# EAGLE board RPI 4B HAT board drawing (EAGLE 9.7.0)
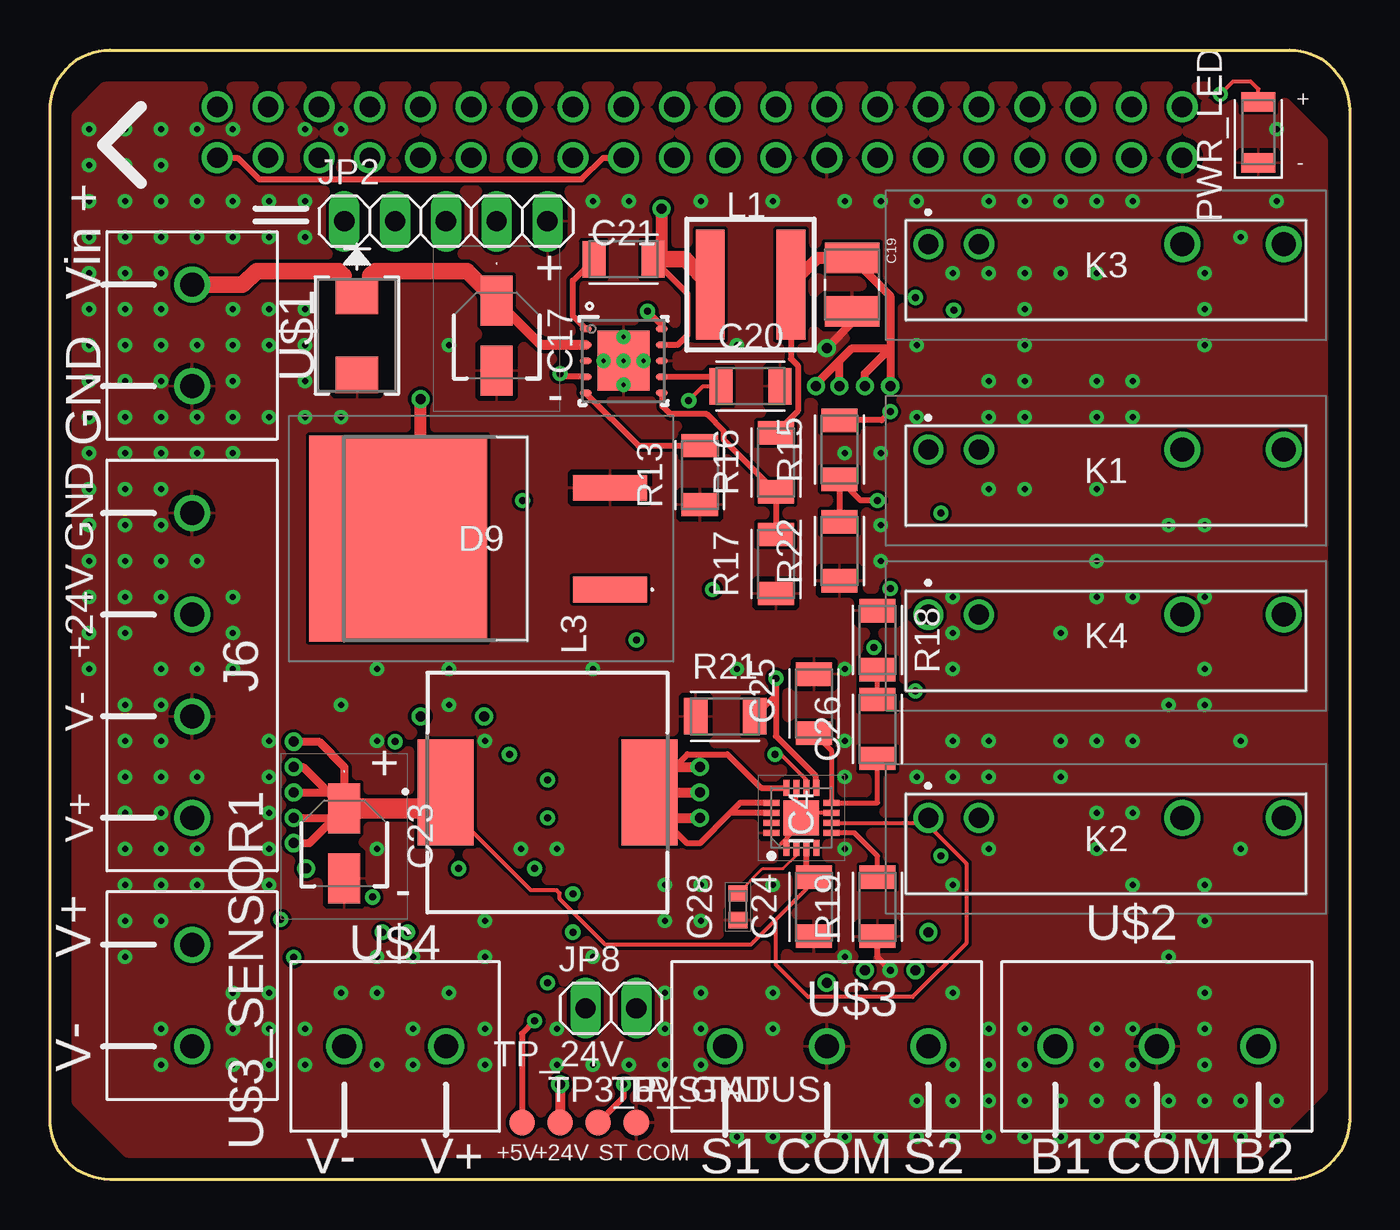
[diagram p0: board, top side]
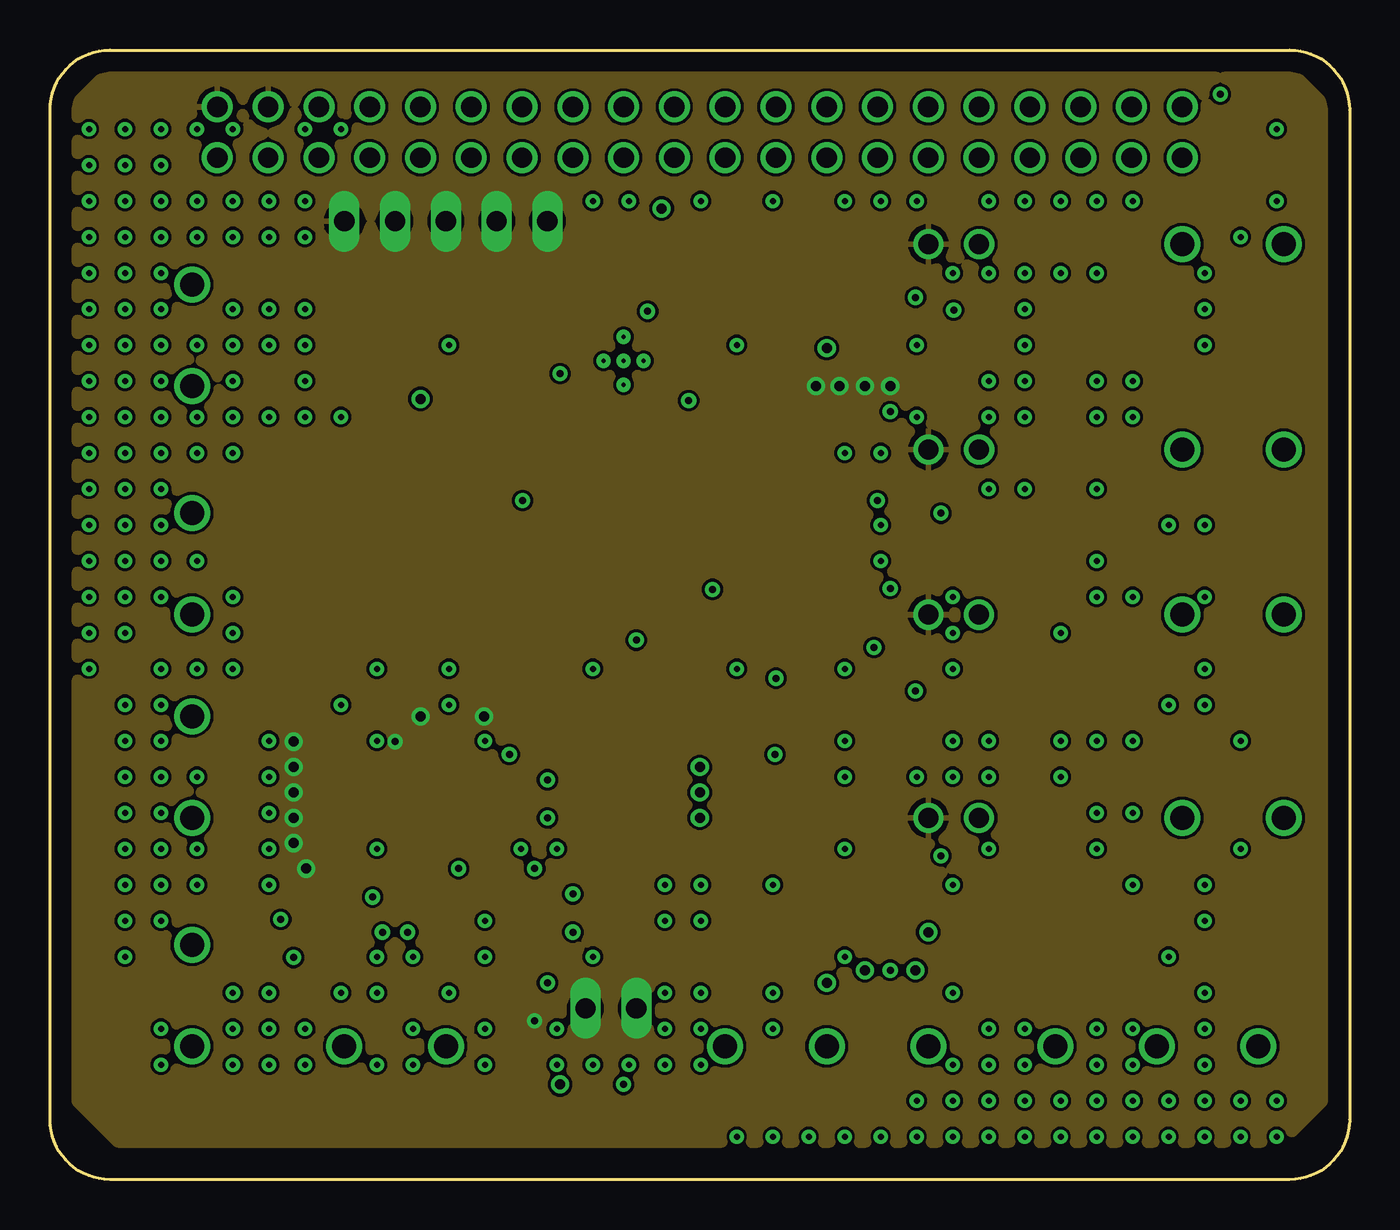
[diagram p1: board, inner layer Route2]
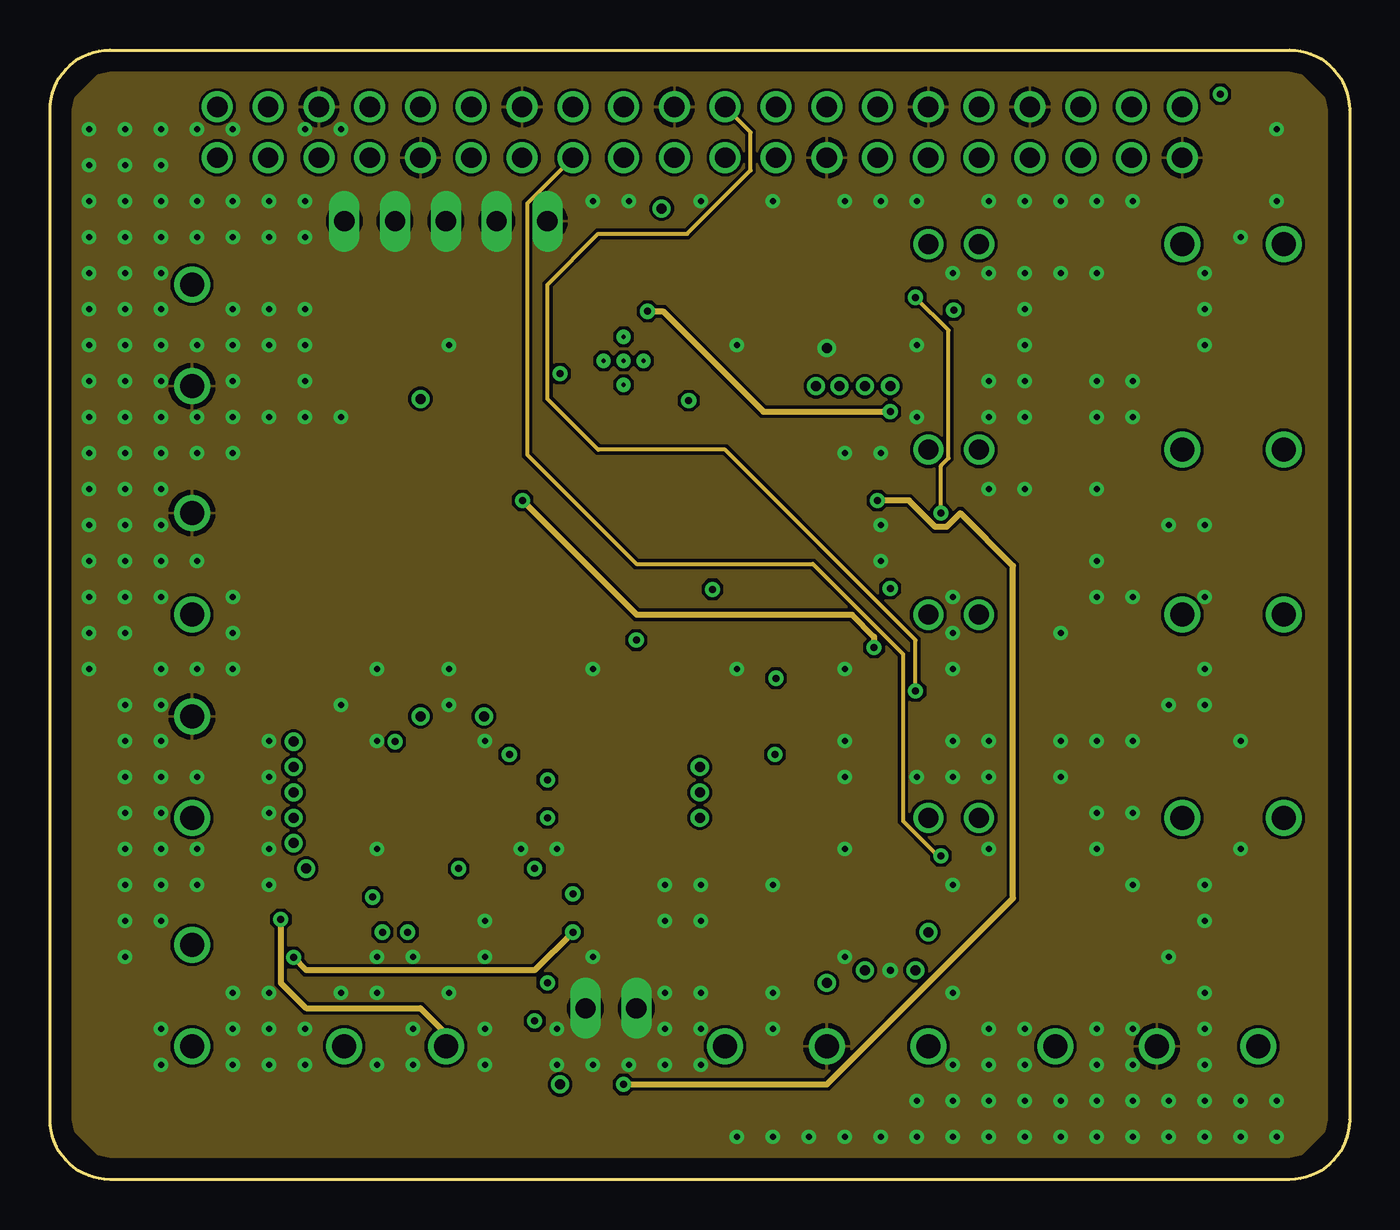
[diagram p2: board, inner layer Route3]
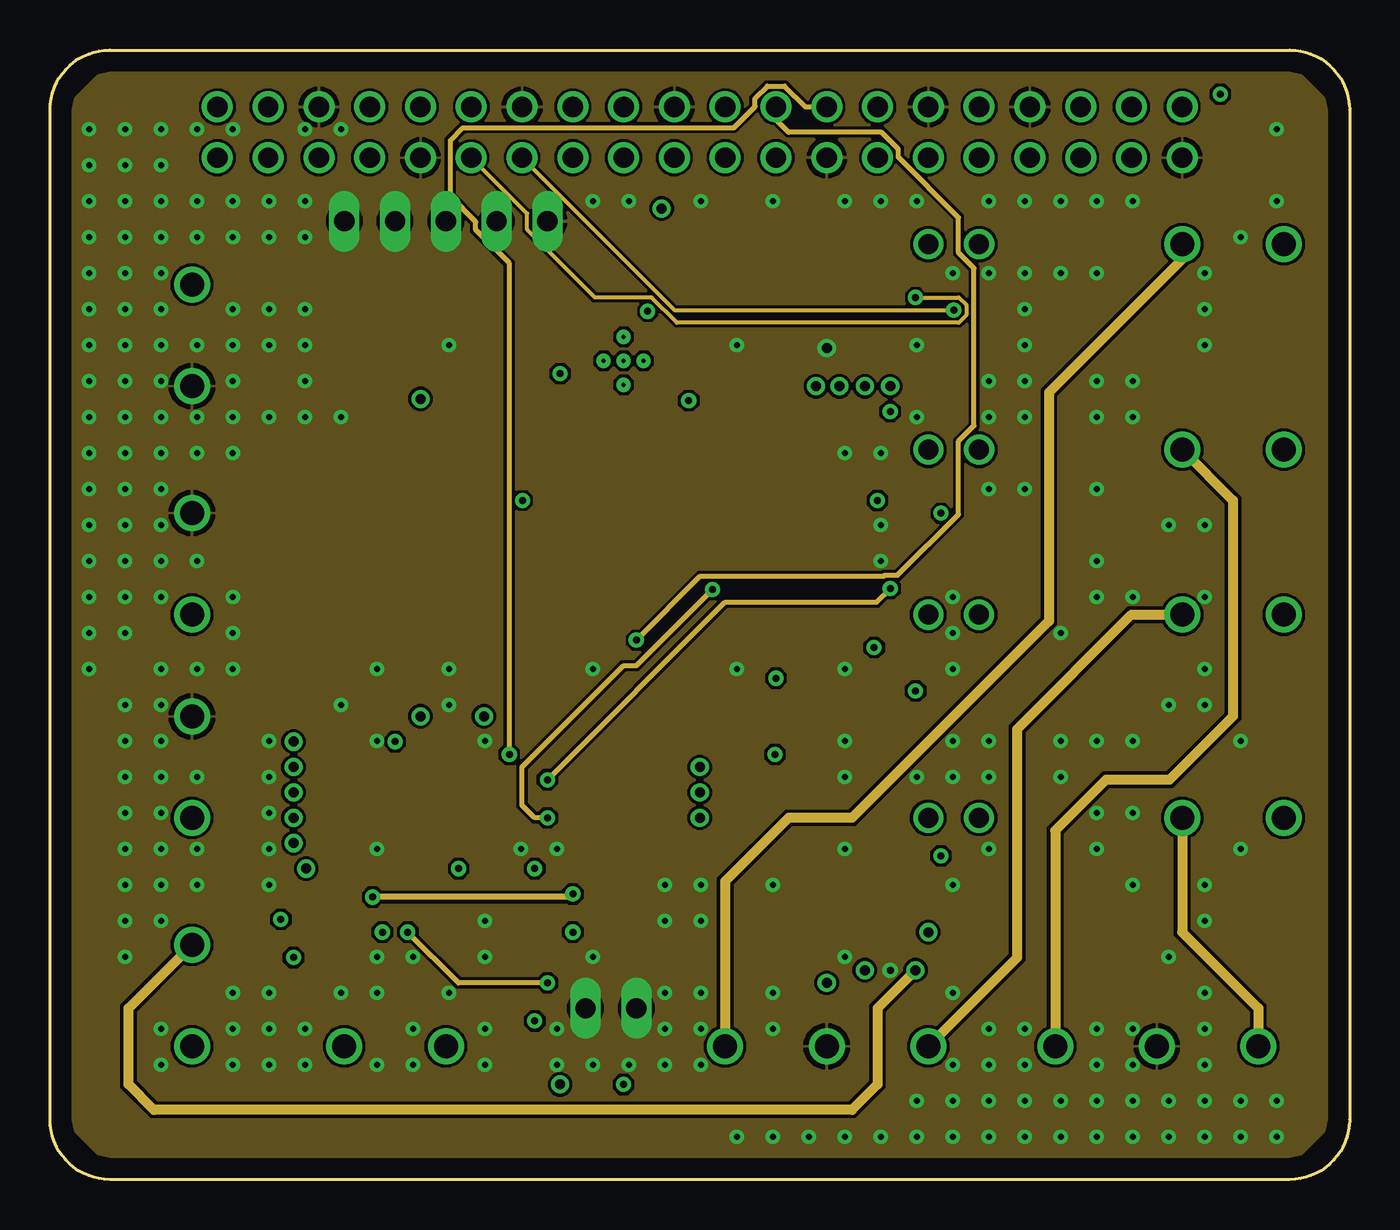
[diagram p3: board, inner layer Route14]
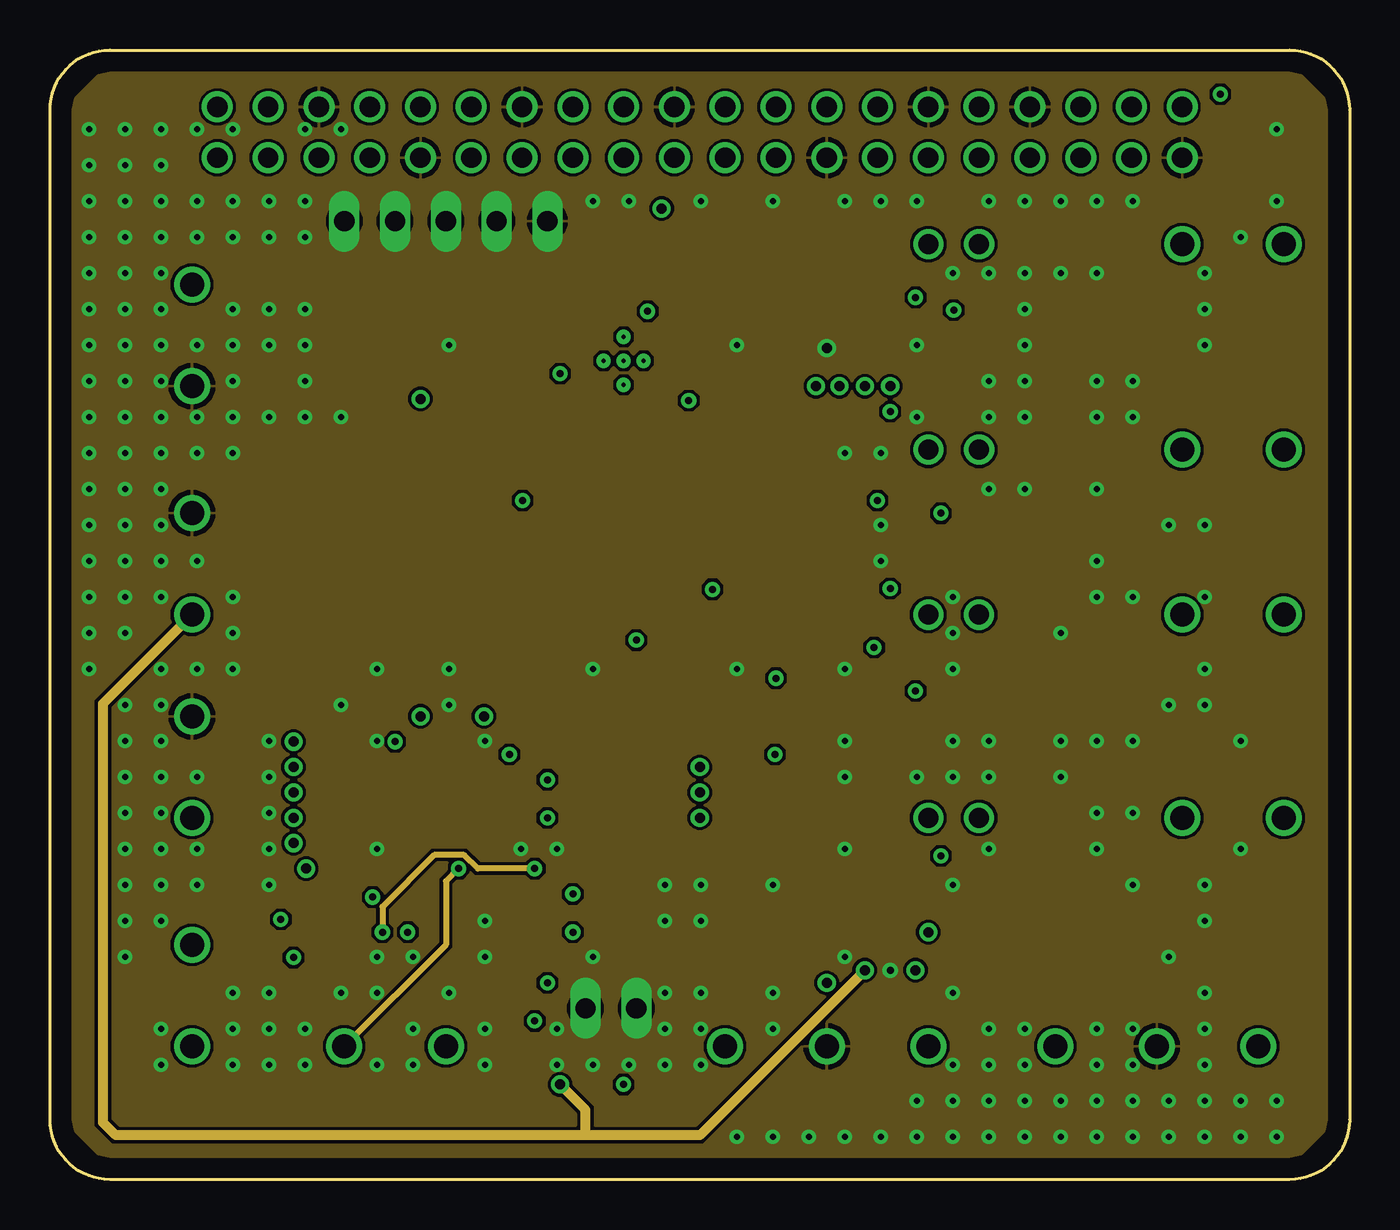
[diagram p4: board, inner layer Route15]
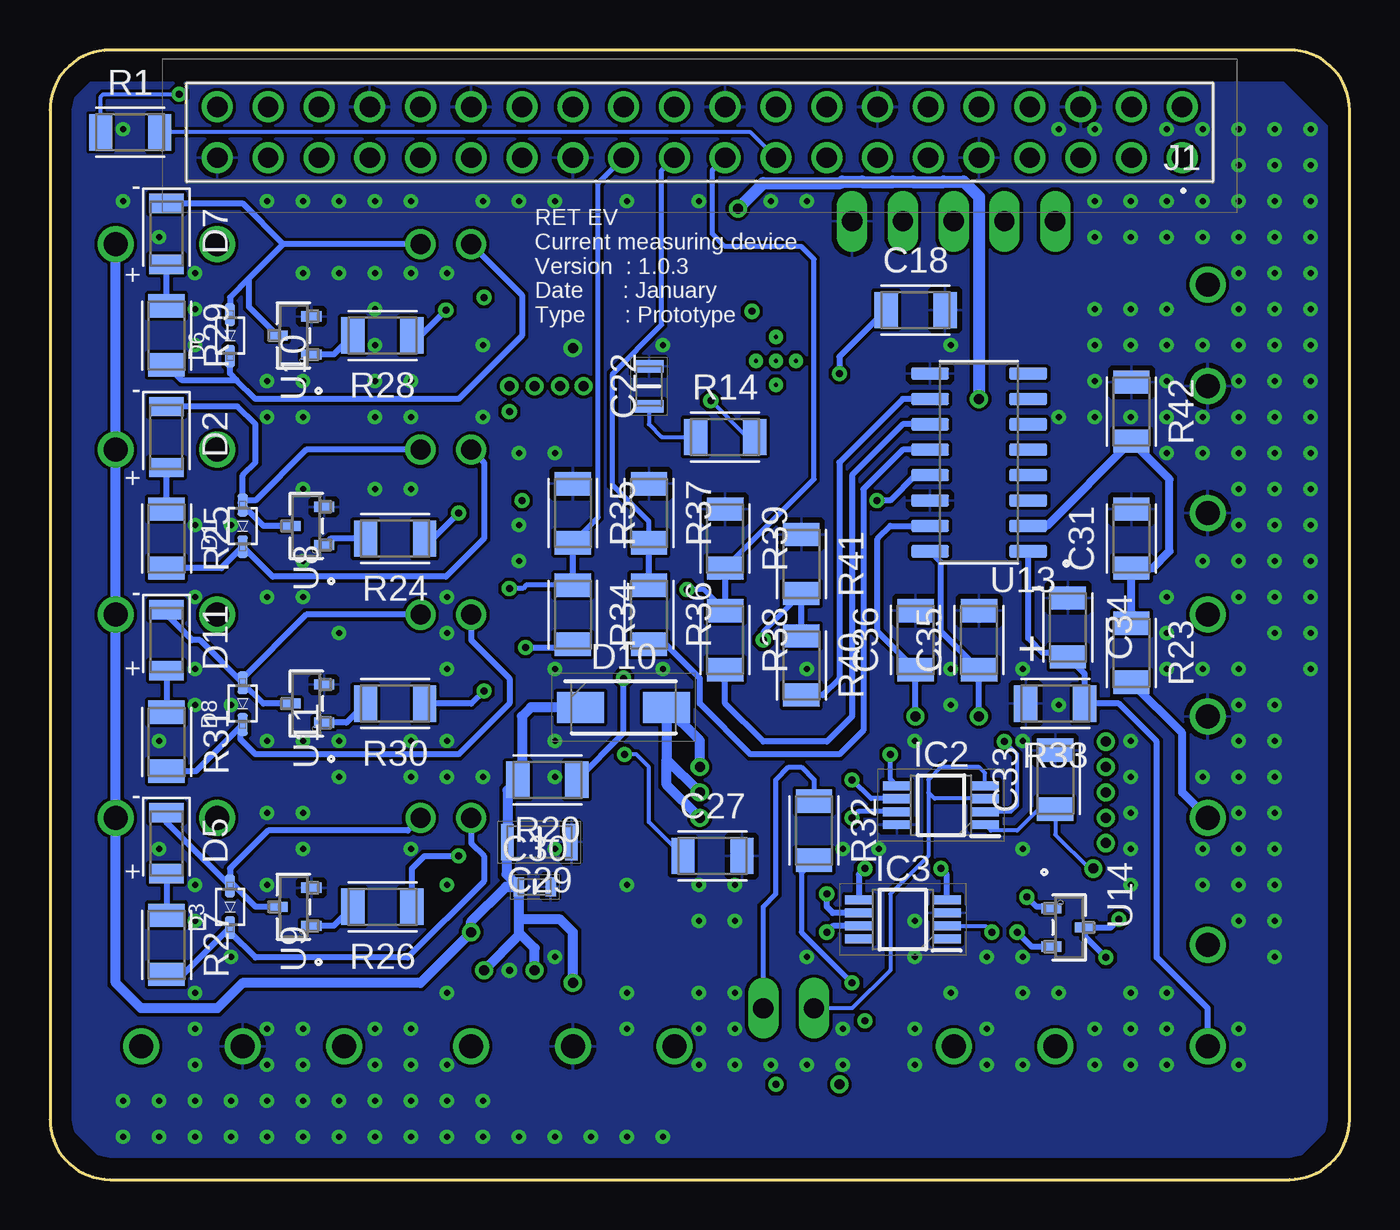
[diagram p5: board, bottom side, seen from below]

Size 65 x 56.5 mm. Coordinates in mm from the lower left corner, seen from the top.
Outline: 3,0 arc-90 0,3 0,53.5 arc-90 3,56.5 62,56.5 arc-90 65,53.5 65,3 arc-90 62,0 3,0
Copper layers (1+2*3+14*15+16): Top / Route2 / Route3 / Route14 / Route15 / Bottom
Stack-up 6 Layer Stack: Top SilkScreen Epoxy Ink / Top SolderMask SR:Green 0.0254mm Dk 4.3 / Top Surface Finish Lead-Free 0.02mm / Top CuFoil:007 0.035mm / Dielectric-1 Prepreg:001 0.064mm / Dielectric-2 Prepreg:001 0.064mm / Route2 CuFoil:007 0.035mm / Dielectric-3 Core:077 0.457mm / Route3 CuFoil:007 0.035mm / Dielectric-4 Prepreg:001 0.064mm / Dielectric-5 Prepreg:001 0.064mm / Route14 CuFoil:007 0.035mm / Dielectric-6 Core:077 0.457mm / Route15 CuFoil:007 0.035mm / Dielectric-7 Prepreg:001 0.064mm / Dielectric-8 Prepreg:001 0.064mm / Bottom CuFoil:007 0.035mm / Bottom Surface Finish Lead-Free 0.02mm / Bottom SolderMask SR:Green 0.0254mm Dk 4.3 / Bottom SilkScreen Epoxy Ink
Design rules: minimum copper width 6mil, minimum drill size 0.25mm, copper clearance wire_polygon to wire_polygon 6mil, copper clearance wire_polygon to pad_smd 6mil, copper clearance wire_polygon to via 6mil, copper clearance pad_smd to pad_smd 6mil, copper clearance pad_smd to via 6mil, copper clearance via to via 6mil, copper clearance smd to pad (same net) 6mil, copper clearance smd to via (same net) 6mil, copper clearance smd to smd (same net) 6mil, dimension clearance 40mil, via restrict clearance 0mil, restrict clearance 0mil, drill distance 6mil, keepout clearance 0mil

## Footprints (pad centres in the part's own frame; a part is rotated, then mirrored left to right if it is on the bottom)
EEE1AA220WR = smd 2.5 x 1.6: 1 -1.75,0; 2 1.75,0
CAPC3216X135 = smd 1.165 x 1.815: 1 -1.475,0; 2 1.475,0
CAPC3225X270N = smd 1.53 x 2.72: 1 -1.341,0; 2 1.341,0
CAPC2012X75N = smd 0.62 x 1.47: 1 -1,0; 2 1,0
CAPC1608X90N = smd 0.81 x 0.94: 1 -0.67,0; 2 0.67,0
CAPC3216X180N = smd 0.62 x 1.82: 1 -1.6,0; 2 1.6,0
CAPC1608X90N' = smd 0.54 x 0.94: 1 -0.8,0; 2 0.8,0
SMBJSERIES_LTF-L = smd 1.803 x 2.134: 1 -1.968,0; 2 1.968,0
SOD-323 = smd 1.14 x 0.52: A 1.04,0; C -1.04,0
LEDC3216X75N_FLAT-R = smd 0.962 x 1.712: A 1.525,0; C -1.525,0
T1210T8G = smd 3.7 x 1.3: 1 13.3,-2.54; 3 13.3,2.54 | smd 8.9 x 10.3: 2 2.7,0
DIOM5226X230N = smd 2.35 x 1.55: 1 -2.15,0; 2 2.15,0
SOP65P490X110-8N = smd 1.4 x 0.45: 1 -2.2,0.975; 2 -2.2,0.325; 3 -2.2,-0.325; 4 -2.2,-0.975; 5 2.2,-0.975; 6 2.2,-0.325; 7 2.2,0.325; 8 2.2,0.975
QFN50P300X300X80-17N = smd 0.8 x 0.3: 1 -1.5,0.75; 2 -1.5,0.25; 3 -1.5,-0.25; 4 -1.5,-0.75; 9 1.5,-0.75; 10 1.5,-0.25; 11 1.5,0.25; 12 1.5,0.75 | smd 0.3 x 0.8: 5 -0.75,-1.5; 6 -0.25,-1.5; 7 0.25,-1.5; 8 0.75,-1.5; 13 0.75,1.5; 14 0.25,1.5; 15 -0.25,1.5; 16 -0.75,1.5 | smd 1.76 x 1.76: 17 0,0
SSQ-120-XX-YYY = drill 1.02 pad 1.55: 1 0,0; 2 0,2.54; 3 -2.54,0; 4 -2.54,2.54; 5 -5.08,0; 6 -5.08,2.54; 7 -7.62,0; 8 -7.62,2.54; 9 -10.16,0; 10 -10.16,2.54; 11 -12.7,0; 12 -12.7,2.54; 13 -15.24,0; 14 -15.24,2.54; 15 -17.78,0; 16 -17.78,2.54; 17 -20.32,0; 18 -20.32,2.54; 19 -22.86,0; 20 -22.86,2.54; 21 -25.4,0; 22 -25.4,2.54; 23 -27.94,0; 24 -27.94,2.54; 25 -30.48,0; 26 -30.48,2.54; 27 -33.02,0; 28 -33.02,2.54; 29 -35.56,0; 30 -35.56,2.54; 31 -38.1,0; 32 -38.1,2.54; 33 -40.64,0; 34 -40.64,2.54; 35 -43.18,0; 36 -43.18,2.54; 37 -45.72,0; 38 -45.72,2.54; 39 -48.26,0; 40 -48.26,2.54
TERMBLK_508-4N = drill 1.2: 1 0,0; 2 5.08,0; 3 10.16,0; 4 15.24,0
1X05 = drill 1.016 long: 1 -5.08,0; 2 -2.54,0; 3 0,0; 4 2.54,0; 5 5.08,0
1X02 = drill 1.016 long: 1 -1.27,0; 2 1.27,0
APAN3105 = drill 1 pad 1.5: 1 0,0; 2 2.54,0 | drill 1.2 pad 1.8: 5 12.7,0; 6 17.78,0
XAL6060-103MEB = smd 1.43 x 5.5: 1 -2.02,0; 2 2.02,0
SRR1210 = smd 5.3 x 2.8: 1 0,-5.1; 2 0,5.1
RESC3216X70 = smd 1.165 x 1.815: 1 -1.475,0; 2 1.475,0
B1,27 = smd 1.27 x 1.27: TP 0,0
DPR0010A = smd 0.6 x 0.3: 1 -1.9,1.6; 2 -1.9,0.8; 3 -1.9,0; 4 -1.9,-0.8; 5 -1.9,-1.6; 6 1.9,-1.6; 7 1.9,-0.8; 8 1.9,0; 9 1.9,0.8; 10 1.9,1.6 | smd 2.6 x 3: 11 0,0 | drill 0.203 pad 0.5: V -1,0; V_1 0,-1.2; V_2 0,0; V_3 0,1.2; V_4 1,0
SOT23_NXP-L = smd 0.508 x 1.016: 1 -0.953,-0.894; 2 0.953,-0.894; 3 0,0.796
SOIC127P600X175-16N = smd 1.9 x 0.6: 1 -2.455,4.445; 2 -2.455,3.175; 3 -2.455,1.905; 4 -2.455,0.635; 5 -2.455,-0.635; 6 -2.455,-1.905; 7 -2.455,-3.175; 8 -2.455,-4.445; 9 2.455,-4.445; 10 2.455,-3.175; 11 2.455,-1.905; 12 2.455,-0.635; 13 2.455,0.635; 14 2.455,1.905; 15 2.455,3.175; 16 2.455,4.445
TERMBLK_508-2N = drill 1.2: 1 0,0; 2 5.08,0
TERMBLK_508-3N = drill 1.2: 1 0,0; 2 5.08,0; 3 10.16,0

## Placement (x,y rotation side)
C17  EEEFC1H2R2R  [EEE1AA220WR]  22.34,42.22 270 top
C18  2.7nF  [CAPC3216X135]  21.71,43.49 0 bottom
C19  GRM32EC81C476KE15L  [CAPC3225X270N]  40.12,44.76 270 top
C20  6.8pF  [CAPC3216X135]  35.04,39.68 0 top
C21  100nF  [CAPC3216X135]  28.69,46.03 180 top
C22  CGA4C2C0G1H472J060AA  [CAPC2012X75N]  35.04,39.68 90 bottom
C23  EEEFC1H2R2R  [EEE1AA220WR]  14.72,16.82 270 top
C24  100nF  [CAPC3216X135]  38.22,13.64 90 top
C25  22pF  [CAPC3216X135]  38.22,23.8 90 top
C26  12nF  [CAPC3216X135]  41.39,22.54 90 top
C27  10nF  [CAPC3216X135]  31.87,16.18 0 bottom
C28  EMK107B7105KA-T  [CAPC1608X90N]  34.41,13.64 270 top
C29  C3216X5R1H106K160AB  [CAPC3216X180N]  40.52,16.88 0 bottom
C30  CGA3E2X7R1H104K080AA  [CAPC1608X90N']  40.76,14.64 0 bottom
C31  0.1uF  [CAPC3216X135]  10.91,32.06 90 bottom
C33  0.1uF  [CAPC3216X135]  14.72,20 90 bottom
C34  15uF  [CAPC3216X135]  14.09,27.61 90 bottom
C35  0.1uF  [CAPC3216X135]  18.53,26.98 90 bottom
C36  0.1uF  [CAPC3216X135]  21.71,26.98 90 bottom
CR1  SMBJ54ASMBJSERIES_LTF-L  [SMBJSERIES_LTF-L]  15.36,42.22 270 top
D1  1N4148WS  [SOD-323]  55.36,32.7 90 bottom
D2  LED_RED  [LEDC3216X75N_FLAT-R]  59.18,37.14 270 bottom
D3  1N4148WS  [SOD-323]  55.99,13.64 90 bottom
D5  LED_RED  [LEDC3216X75N_FLAT-R]  59.17,16.82 270 bottom
D6  1N4148WS  [SOD-323]  55.99,42.22 90 bottom
D7  LED_RED  [LEDC3216X75N_FLAT-R]  59.17,47.3 270 bottom
D8  1N4148WS  [SOD-323]  55.36,23.8 90 bottom
D9  STPS30M60SG-TR  [T1210T8G]  14.72,32.06 0 top
D10  B240A-13-F  [DIOM5226X230N]  36.31,23.62 0 bottom
D11  LED_RED  [LEDC3216X75N_FLAT-R]  59.17,26.98 270 bottom
IC2  DAC8551IDGKR  [SOP65P490X110-8N]  20.44,18.72 180 bottom
IC3  XTR117AIDGKR  [SOP65P490X110-8N]  22.34,13.01 180 bottom
IC4  LM5157QRTERQ1  [QFN50P300X300X80-17N]  37.58,18.09 90 top
J1  SSQ-120-03-G-D  [SSQ-120-XX-YYY]  8.37,51.11 0 bottom
J6  2828XX-4282837-4  [TERMBLK_508-4N]  7.1,33.33 270 top
JP2  PINHD-1X5  [1X05]  19.8,47.94 0 top
JP8  [1X02]  28.05,8.56 0 top
K1  APAN3105  [APAN3105]  43.93,36.51 0 top
K2  APAN3105  [APAN3105]  43.93,18.09 0 top
K3  APAN3105  [APAN3105]  43.93,46.79 0 top
K4  APAN3105  [APAN3105]  43.93,28.25 0 top
L1  XAL6060-103MEB  [XAL6060-103MEB]  35.04,44.76 0 top
L3  SRR1210-270M  [SRR1210]  24.88,19.36 270 top
PWR_LED  LED_RED  [LEDC3216X75N_FLAT-R]  60.44,52.38 90 top
R1  1k  [RESC3216X70]  60.99,52.38 0 bottom
R13  221kΩ  [RESC3216X70]  32.5,35.24 90 top
R14  28.7kΩ  [RESC3216X70]  31.23,37.14 0 bottom
R15  1kΩ  [RESC3216X70]  39.48,36.51 90 top
R16  60.4kΩ  [RESC3216X70]  36.31,35.87 90 top
R17  11.5kΩ  [RESC3216X70]  36.31,30.79 90 top
R18  845Ω  [RESC3216X70]  41.39,26.98 270 top
R19  9.76kΩ  [RESC3216X70]  41.39,13.64 90 top
R20  57.6kΩ  [RESC3216X70]  40.12,20 180 bottom
R21  2.49kΩ  [RESC3216X70]  33.77,23.17 0 top
R22  499  [RESC3216X70]  39.48,31.43 90 top
R23  25k  [RESC3216X70]  10.91,26.34 270 bottom
R24  1k  [RESC3216X70]  47.74,32.06 180 bottom
R25  1k  [RESC3216X70]  59.17,32.06 270 bottom
R26  1k  [RESC3216X70]  48.38,13.64 180 bottom
R27  1k  [RESC3216X70]  59.17,11.74 270 bottom
R28  1k  [RESC3216X70]  48.38,42.22 180 bottom
R29  1k  [RESC3216X70]  59.17,42.22 270 bottom
R30  1k  [RESC3216X70]  47.74,23.8 180 bottom
R31  1k  [RESC3216X70]  59.17,21.9 270 bottom
R32  25k  [RESC3216X70]  26.79,17.45 270 bottom
R33  250  [RESC3216X70]  14.72,23.8 0 bottom
R34  1k  [RESC3216X70]  38.85,28.25 270 bottom
R35  2k  [RESC3216X70]  38.85,33.33 270 bottom
R36  1k  [RESC3216X70]  35.04,28.25 270 bottom
R37  2k  [RESC3216X70]  35.04,33.33 270 bottom
R38  1k  [RESC3216X70]  31.23,26.98 270 bottom
R39  2k  [RESC3216X70]  31.23,32.06 270 bottom
R40  1k  [RESC3216X70]  27.42,25.71 270 bottom
R41  2k  [RESC3216X70]  27.42,30.79 270 bottom
R42  25k  [RESC3216X70]  10.91,38.41 270 bottom
TP3_5V  TPB1,27  [B1,27]  25.52,2.85 0 top
TP_24V  TPB1,27  [B1,27]  23.61,2.85 180 top
TP_GND  TPB1,27  [B1,27]  29.32,2.85 0 top
TP_STATUS  TPB1,27  [B1,27]  27.42,2.85 0 top
U7  TPS54561QDPRRQ1DPR0010A  [DPR0010A]  28.69,40.95 0 top
U8  BC847SOT23_NXP-L  [SOT23_NXP-L]  52.19,32.7 90 bottom
U9  BC847SOT23_NXP-L  [SOT23_NXP-L]  52.82,13.64 90 bottom
U10  BC847SOT23_NXP-L  [SOT23_NXP-L]  52.82,42.22 90 bottom
U11  BC847SOT23_NXP-L  [SOT23_NXP-L]  52.19,23.8 90 bottom
U13  MCP3008-I/SL  [SOIC127P600X175-16N]  18.53,35.87 180 bottom
U14  BC847SOT23_NXP-L  [SOT23_NXP-L]  14.02,12.61 270 bottom
U$1  2828XX-2282837-2  [TERMBLK_508-2N]  7.1,39.68 90 top
U$2  2828XX-3282837-3  [TERMBLK_508-3N]  50.28,6.66 0 top
U$3  2828XX-3282837-3  [TERMBLK_508-3N]  33.77,6.66 0 top
U$3_SENSOR1  2828XX-2282837-2  [TERMBLK_508-2N]  7.1,6.66 90 top
U$4  2828XX-2282837-2  [TERMBLK_508-2N]  19.8,6.66 180 top

## Library data of the parts
C17 C23 = EEEFC1H2R2R; DESCRIPTION: Panasonic 2.2uF 50V dc Aluminium Electrolytic Capacitor, Surface Mount 4 (Dia.) x 5.4mm +105C 4mm; HEIGHT: 5.5mm; MANUFACTURER_NAME: Panasonic; MANUFACTURER_PART_NUMBER: EEEFC1H2R2R
C18 C20 C21 C24-C27 = Tinkercad; CATEGORY: Capacitor
C19 = GRM32EC81C476KE15L; AVAILABILITY: In Stock; CHECK_PRICES: https://www.snapeda.com/parts/GRM32EC81C476KE15L/Murata/view-part/?ref=eda; DESCRIPTION: 47 µF ±10% 16V Ceramic Capacitor X6S 1210 (3225 Metric); MF: Murata Electronics; MP: GRM32EC81C476KE15L; PACKAGE: 3225 Murata; PRICE: None; SNAPEDA_LINK: https://www.snapeda.com/parts/GRM32EC81C476KE15L/Murata/view-part/?ref=snap
C22 = CGA4C2C0G1H472J060AA; DESCRIPTION: Multilayer Ceramic Chip Capacitors, Capacitance=4.7nF, LxWxT:2x1.25x0.6mm; HEIGHT: 0.75mm; MANUFACTURER_NAME: TDK; MANUFACTURER_PART_NUMBER: CGA4C2C0G1H472J060AA; MOUSER_PART_NUMBER: 810-CGA4C2C0G1H472J; MOUSER_PRICE-STOCK: https://www.mouser.co.uk/ProductDetail/TDK/CGA4C2C0G1H472J060AA?qs=FxQuwy19cyCgdYzJw5%252BHfA%3D%3D
C28 = EMK107B7105KA-T; DESCRIPTION: Ceramic Capacitor 0603 16V 1uF; HEIGHT: 0.9mm; MANUFACTURER_NAME: TAIYO YUDEN; MANUFACTURER_PART_NUMBER: EMK107B7105KA-T; MOUSER_PART_NUMBER: 963-EMK107B7105KA-T; MOUSER_PRICE-STOCK: https://www.mouser.co.uk/ProductDetail/TAIYO-YUDEN/EMK107B7105KA-T?qs=I6KAKw0tg2zS1zj87Lm%2FxQ%3D%3D
C29 = C3216X5R1H106K160AB; DESCRIPTION: 1206 X5R ceramic capacitor 10uF 50V TDK 1206 C 10F Ceramic Multilayer Capacitor, 50 V dc X5R Dielectric +/-10% SMD; HEIGHT: 1.8mm; MANUFACTURER_NAME: TDK; MANUFACTURER_PART_NUMBER: C3216X5R1H106K160AB; MOUSER_PART_NUMBER: 810-C3216X5R1H106K; MOUSER_PRICE-STOCK: https://www.mouser.co.uk/ProductDetail/TDK/C3216X5R1H106K160AB?qs=NRhsANhppD%252BLHMbxvQzsEQ%3D%3D
C30 = CGA3E2X7R1H104K080AA; DESCRIPTION: Multilayer Ceramic Chip Capacitors, Capacitance=0.1uF, LxWxT:1.6x0.8x0.8mm; HEIGHT: 0.9mm; MANUFACTURER_NAME: TDK; MANUFACTURER_PART_NUMBER: CGA3E2X7R1H104K080AA; MOUSER_PART_NUMBER: 810-CGA3E2X7R1H104K; MOUSER_PRICE-STOCK: https://www.mouser.co.uk/ProductDetail/TDK/CGA3E2X7R1H104K080AA?qs=NRhsANhppD%2Fge2a869G9Fg%3D%3D
C31 C33-C36 = Capacitor; CATEGORY: Capacitor
CR1 = 2024-04-09_15-45-34_Library; COPYRIGHT: Copyright (C) 2024 Ultra Librarian. All rights reserved.; MANUFACTURER_PART_NUMBER: SMBJ54A; MFR_NAME: Littelfuse Inc
D1 D3 D6 D8 = Diodes; CREATED_BY: PCBLayout.com; DIGIKEY_PART_NUMBER: 1N4148WSFSTR-ND; MANUFACTURER: Diodes Incorporated; MPN: 1N4148WS; PACKAGE: SOD-323
D2 D5 D7 D11 PWR_LED = LED; CATEGORY: LED; COLOR: RED; DESCRIPTION: CHIP LED FLAT; SUB-CATEGORY: CHIP; TYPE: FLAT_TOP
D9 = STPS30M60SG-TR; DESCRIPTION: STMicroelectronics STPS30M60SG-TR, SMT Schottky Diode, 60V 30A, 3-Pin D2PAK; HEIGHT: 4mm; MANUFACTURER_NAME: STMicroelectronics; MANUFACTURER_PART_NUMBER: STPS30M60SG-TR; MOUSER_PART_NUMBER: 511-STPS30M60SG-TR; MOUSER_PRICE-STOCK: https://www.mouser.co.uk/ProductDetail/STMicroelectronics/STPS30M60SG-TR?qs=G49gCGQm93g67AcseEWC2A%3D%3D
D10 = B240A-13-F; DESCRIPTION: Schottky Diode 2A 40V 0.5Vf SMA Diodes Inc B240A-13-F, SMT Schottky Diode, 40V 2A, 2-Pin DO-214AC; HEIGHT: 2.3mm; MANUFACTURER_NAME: Diodes Incorporated; MANUFACTURER_PART_NUMBER: B240A-13-F; MOUSER_PART_NUMBER: 621-B240A-F; MOUSER_PRICE-STOCK: https://www.mouser.co.uk/ProductDetail/Diodes-Incorporated/B240A-13-F?qs=idJYQZufS6jleWUCPMvVdQ%3D%3D
IC2 = DAC8551IDGKR; DESCRIPTION: 16-Bit, Ultralow Glitch, Voltage Output, Digital to Analog Converter; HEIGHT: 1.1mm; MANUFACTURER_NAME: Texas Instruments; MANUFACTURER_PART_NUMBER: DAC8551IDGKR; MOUSER_PART_NUMBER: 595-DAC8551IDGKR; MOUSER_PRICE-STOCK: https://www.mouser.co.uk/ProductDetail/Texas-Instruments/DAC8551IDGKR?qs=vul0MlC%2Fa1dStr8sTUNGkA%3D%3D
IC3 = XTR117AIDGKR; DESCRIPTION: Sensor Interface XTR117 4-20mA Crnt Loop Transmitter; HEIGHT: 1.1mm; MANUFACTURER_NAME: Texas Instruments; MANUFACTURER_PART_NUMBER: XTR117AIDGKR; MOUSER_PART_NUMBER: 595-XTR117AIDGKR; MOUSER_PRICE-STOCK: https://www.mouser.co.uk/ProductDetail/Texas-Instruments/XTR117AIDGKR?qs=zqbRmZ%252BfZD%252BYMdmF%252BmhQwg%3D%3D
IC4 = LM5157QRTERQ1; DESCRIPTION: Switching Voltage Regulators 6-A, 50-V, 2.2-MHz wide VIN boost, flyback, & SEPIC converter with dual random spread spectrum; HEIGHT: 0.8mm; MANUFACTURER_NAME: Texas Instruments; MANUFACTURER_PART_NUMBER: LM5157QRTERQ1; MOUSER_PART_NUMBER: 595-LM5157QRTERQ1; MOUSER_PRICE-STOCK: https://www.mouser.co.uk/ProductDetail/Texas-Instruments/LM5157QRTERQ1?qs=QNEnbhJQKvb8%252BoI1%252BJEaeg%3D%3D
J1 = SSQ-120-03-G-D; DESCRIPTION: 40 Position, .100&quot; Tiger Buy&trade; Socket Strip, Square Tail; HEIGHT: mm; MANUFACTURER_NAME: SAMTEC; MANUFACTURER_PART_NUMBER: SSQ-120-03-G-D; MOUSER_PART_NUMBER: 200-SSQ12003GD; MOUSER_PRICE-STOCK: https://www.mouser.co.uk/ProductDetail/Samtec/SSQ-120-03-G-D?qs=rU5fayqh%252BE0nmWFGK5lT6g%3D%3D
J6 = Connector; CATEGORY: Fixed Terminal Blocks; DATASHEET: https://www.te.com/usa-en/product-282837-4.datasheet.pdf; DESCRIPTION: 4 Position Wire to Board Terminal Block Horizontal with Board 0.200" (5.08mm) Through Hole; MANUFACTURER: TE Connectivity AMP Connectors; MPN: 282837-4; OPERATING_TEMPERATURE: -40°C ~ 105°C; PACKAGE_SIZE: NA; PACKAGE_TYPE: THT; PART_STATUS: ACTIVE; PITCH: 0.200" (5.08mm); ROHS: COMPLIANT; SERIES: Buchanan; SUBCATEGORY: Terminal Blocks; TYPE: Through Hole Screw - Rising Cage Clamp Side wire entry Horizontal with Board
JP2 = Connector; CATEGORY: Headers; DESCRIPTION: Header-Straight-5 Position; PACKAGE_TYPE: THT; PITCH: 0.100" (2.54mm); SUBCATEGORY: Headers-Male Pins; TYPE: Board to Board or Cable-Unshrouded-Through Hole-Straight
JP8 = pinhead
K1-K4 = APAN3105; DESCRIPTION: Panasonic SPNO PCB Mount Non-Latching Relay, 5V dc Coil 5 A Non-Latching Relay; HEIGHT: 12mm; MANUFACTURER_NAME: Panasonic; MANUFACTURER_PART_NUMBER: APAN3105; MOUSER_PART_NUMBER: 769-APAN3105; MOUSER_PRICE-STOCK: https://www.mouser.co.uk/ProductDetail/Panasonic-Industrial-Devices/APAN3105?qs=WfzemSix46txUgv3897GSA%3D%3D
L1 = XAL6060-103MEB; DESCRIPTION: Fixed Inductors XAL6060 High Current 10 uH 20% 7 A Compos; HEIGHT: mm; MANUFACTURER_NAME: COILCRAFT; MANUFACTURER_PART_NUMBER: XAL6060-103MEB; MOUSER_PART_NUMBER: 994-XAL6060-103MEB; MOUSER_PRICE-STOCK: https://www.mouser.co.uk/ProductDetail/Coilcraft/XAL6060-103MEB?qs=VJjuEbE9QBODk8cxO8T25A%3D%3D
L3 = SRR1210-270M; DESCRIPTION: Bourns SRR1210 Series Type 1210 Shielded Wire-wound SMD Inductor with a Ferrite Core, 27 uH +/-20% Wire-Wound 5A Idc; HEIGHT: mm; MANUFACTURER_NAME: Bourns; MANUFACTURER_PART_NUMBER: SRR1210-270M; MOUSER_PART_NUMBER: 652-SRR1210-270M; MOUSER_PRICE-STOCK: https://www.mouser.co.uk/ProductDetail/Bourns/SRR1210-270M?qs=4vvWAaIu%2Fq78Cj5nf%2FUfqQ%3D%3D
R1 R13-R42 = Tinkercad; CATEGORY: Resistor; SUB-CATEGORY: Fixed
TP3_5V TP_24V TP_GND TP_STATUS = testpad
U7 = 2024-10-11_09-28-41_Library; COPYRIGHT: Copyright (C) 2024 Ultra Librarian. All rights reserved.; MANUFACTURER_PART_NUMBER: TPS54561QDPRRQ1; MFR_NAME: Texas Instruments; REFDES: RefDes; TYPE: TYPE
U8-U11 U14 = 2024-10-31_10-28-23_Library; COPYRIGHT: Copyright (C) 2024 Ultra Librarian. All rights reserved.; MANUFACTURER_PART_NUMBER: BC847; MFR_NAME: NXP
U13 = SnapEDA Library
U$1 U$3_SENSOR1 U$4 = Connector; CATEGORY: Connector; DESCRIPTION: 2 Position Wire to Board Terminal Block Horizontal with Board 5.08 mm Through Hole; MANUFACTURER: TE Connectivity; MPN: 282837-2; OPERATING_TEMPERATURE: -40°C to +105°C; PART_STATUS: ACTIVE; ROHS_COMPLIANCE: RoHS Compliant; SERIES: 282837; SUBCATEGORY: Terminal Block; TYPE: Side Wire Entry
U$2 U$3 = Connector; CATEGORY: Connector; DESCRIPTION: TERM BLK 3P SIDE ENT 5.08mm PCB; MANUFACTURER: TE Connectivity; MPN: 282837-3; OPERATING_TEMPERATURE: -40°C to +105°C; PART_STATUS: Active; ROHS_COMPLIANCE: RoHS Compliant; SERIES: 282837; SUBCATEGORY: Terminal Block; TYPE: Side Wire Entry

## Nets
+3V3: J1.1 J1.17 R1.2
+5V: C19.1 C23.1 C24.2 C33.1 C35.1 C36.1 D1.C D3.C D6.C D8.C IC2.1 IC2.2 IC4.3 IC4.6 J1.2 J1.4 JP2.1 K1.1 K2.1 K3.1 K4.1 L1.2 L3.1 R16.2 R25.2 R27.2 R29.2 R31.2 TP_24V.TP U13.15 U13.16
+24V: C29.1 C30.1 D10.1 J6.2 K1.6 K2.6 K3.6 K4.6 R20.2 TP3_5V.TP U$3_SENSOR1.2
BMS_OUT1: K1.5 U$2.1
BMS_OUT2: K2.5 U$2.3
CLK_ADC: R34.2 U13.13
DAC_OUT: IC2.3 IC2.4 JP8.1
DIN_ADC: R38.2 U13.11
DOUT_ADC: R36.2 U13.12
GND: C17.2 C18.2 C19.2 C20.2 C22.2 C23.2 C24.1 C25.2 C27.2 C28.2 C29.2 C30.2 C31.2 C33.2 C34.2 C35.2 C36.2 CR1.2 D9.3 IC2.8 IC3.3 IC4.1 IC4.7 IC4.11 IC4.16 IC4.17 J1.6 J1.9 J1.14 J1.20 J1.25 J1.30 J1.34 J1.39 J6.1 J6.3 JP2.5 PWR_LED.C R13.1 R17.1 R18.1 R19.1 R21.1 R22.1 R33.1 R35.1 R37.1 R39.1 R41.1 R42.1 TP_GND.TP U7.8 U7.11 U8.2 U9.2 U10.2 U11.2 U13.9 U13.14 U$1.1 U$2.2 U$3.2
GPIO0: J1.27
GPIO1: J1.28
GPIO2: J1.3
GPIO3: J1.5
GPIO4: J1.7
GPIO5: J1.29
GPIO6: J1.31
GPIO7: IC2.5 J1.26
GPIO8: J1.24 R40.1 R41.2
GPIO9: J1.21 R36.1 R37.2
GPIO10: IC2.7 J1.19 R38.1 R39.2
GPIO11: IC2.6 J1.23 R34.1 R35.2
GPIO12: J1.32
GPIO13: J1.33
GPIO14: J1.8
GPIO15: J1.10
GPIO16: J1.36
GPIO17: J1.11 R24.1
GPIO18: J1.12
GPIO19: J1.35
GPIO20: J1.38
GPIO21: J1.40
GPIO22: J1.15 R26.1
GPIO23: J1.16
GPIO24: J1.18
GPIO25: J1.22 R30.1
GPIO26: J1.37
GPIO27: J1.13 R28.1
N$1: J6.4 R23.2
N$2: D2.A R25.1
N$3: IC3.4 U$4.2
N$4: IC3.7 U14.3 U$4.1
N$5: PWR_LED.A R1.1
N$19: D1.A D2.C K1.2 U8.3
N$20: C34.1 R33.2 U13.1 U$3_SENSOR1.1
N$22: C17.1 CR1.1 U7.2 U$1.2
N$23: R13.2 U7.5
N$24: C18.1 U7.4
N$25: C22.1 R14.1
N$26: C20.1 R14.2 U7.7
N$27: C21.2 U7.1
N$28: C21.1 D9.2 L1.1 U7.9
N$29: R15.2 U7.10
N$30: R16.1 R17.2 U7.6
N$31: C28.1 IC4.2
N$32: C25.1 C26.1 IC4.8
N$33: C26.2 R18.2
N$34: C27.1 IC4.10
N$35: IC4.5 R19.2
N$36: D10.2 IC4.12 IC4.13 IC4.14 L3.2
N$37: IC4.9 R20.1 R21.2
N$38: R15.1 R22.2 TP_STATUS.TP
N$39: R24.2 U8.1
N$40: D3.A D5.C K2.2 U9.3
N$41: D5.A R27.1
N$42: R26.2 U9.1
N$43: D6.A D7.C K3.2 U10.3
N$44: D7.A R29.1
N$45: R28.2 U10.1
N$46: D8.A D11.C K4.2 U11.3
N$47: D11.A R31.1
N$48: R30.2 U11.1
N$49: IC3.5 U14.2
N$50: IC3.6 U14.1
N$51: JP8.2 R32.1
N$52: IC3.2 R32.2
N$56: C31.1 R23.1 R42.2 U13.2
SCADA_OUT1: K3.5 U$3.1
SCADA_OUT2: K4.5 U$3.3
SHDN/!CS_ADC: R40.2 U13.10

## Tracks (layer width: path | path; a pad name or v marks a point on that pad's centre or on a via)
+3V3
  Top 0.305: J1.1 9.38,51.11 10.46,50.03 26.6,50.03 27.68,51.11 J1.17
  Bottom 0.2: J1.17 29.96,52.38 R1.2
+5V  (via drill 0.35, 0.5)
  Top 0.203: IC4.3 37.83,14.53 36.31,13.01 | 36.31,13.01 35.04,11.74 27.8,11.74 25.49,14.04 25.49,14.32 25.35,14.46 24.06,14.46 19.47,19.05 | 36.31,13.01 36.31,10.74 37.92,9.13 43.14,9.13 45.84,11.82 45.84,15.81 43.8,17.84 IC4.6
  Top 0.305: C24.2 37.83,15.5 IC4.3 | v24.25,7.93 23.61,7.29 TP_24V.TP | L1.2 37.06,41.06 37.4,40.71 37.4,38.44 R16.2
  Top 0.406: C19.1 42.02,44.2 42.02,41.59 | v12.18,20.63 12.66,20.63 C23.1 | v12.18,19.36 13.93,19.36 C23.1 | v12.18,18.09 14.24,18.09 C23.1 | v12.19,16.83 12.98,16.83 C23.1 | v12.18,21.9 13.45,21.9 14.72,20.63 C23.1 | 42.02,41.59 v42.02,39.68 | v40.76,39.68 40.76,40.32 42.02,41.59 | v39.48,39.68 39.48,40.95 | 39.48,40.95 40.12,41.59 42.02,41.59 | v38.31,39.68 38.31,39.78 39.48,40.95
  Top 0.61: L1.2 38.4,46.1 C19.1
  Top 1.016: L3.1 19.47,19.05 18.99,18.57 C23.1
  Bottom 0.203: v12.82,15.55 13.02,15.55 14.72,17.25 C33.1 15.56,18.52 16.62,17.45 17.94,17.45 IC2.1 | IC2.2 16.95,18.4 16.62,18.72 16.62,21.27 v17.26,21.9
  Bottom 0.305: D1.C 55.48,31.54 | 59.17,31.02 R25.2 56.43,30.58 D1.C | v21.71,23.17 C36.1 23.61,27.41 23.61,32.06 22.98,32.7 U13.15 | v18.53,23.17 C35.1 20.44,27.41 20.44,30.87 U13.16 | K3.1 41.39,44.24 41.39,42.22 44.56,39.05 54.73,39.05 55.68,40 | 55.68,40 55.99,40.32 D6.C | R29.2 58.42,40 55.68,40 | K1.1 43.3,35.87 43.3,32.06 45.2,30.15 53.86,30.15 D1.C | D8.C 55.48,22.65 | 55.48,22.65 57.7,20.43 R31.2 | K4.1 43.93,26.98 42.02,25.07 42.02,23.8 44.56,21.27 54.73,21.27 55.48,22.02 55.48,22.65 | K2.1 43.93,16.82 43.3,16.18 43.3,14.91 47.11,11.11 54.73,11.11 55.99,12.38 D3.C 58.34,10.26 R27.2
  pour Route2: 0.75,53.65 0.75,4.12 3.29,1.58 61.71,1.58 64.25,4.12 64.25,53.65 61.71,56.19 3.29,56.19
+24V  (via drill 0.5)
  Top 0.508: v25.52,4.76 TP3_5V.TP
  Route14 0.508: v43.3,10.47 41.39,8.56 41.39,4.76 40.12,3.48 5.2,3.48 3.92,4.76 3.92,8.56 U$3_SENSOR1.2
  Route15 0.508: v40.76,10.47 32.5,2.22 26.79,2.22 | 26.79,2.22 3.29,2.22 2.66,2.85 2.66,23.8 J6.2 | 26.79,2.22 26.79,3.48 v25.52,4.76
  Bottom 0.508: D10.1 40.95,23.61 41.39,23.17 41.39,20.2 R20.2 42.12,19.47 C29.1 42.18,16.88 42.18,15.26 C30.1 | C30.1 42.19,14.64 43.93,12.9 v43.93,12.38 46.47,9.83 55.36,9.83 56.63,8.56 60.44,8.56 61.71,9.83 K2.6 K4.6 K1.6 K3.6 | C30.1 41.55,13.01 | 41.55,13.01 41.55,12.38 | 41.55,12.38 41.55,12.21 v43.3,10.47 | v40.76,10.47 40.76,11.57 41.55,12.38 | v38.85,9.83 38.85,12.38 39.48,13.01 41.55,13.01
BMS_OUT1
  Route14 0.508: U$2.1 50.28,17.45 52.82,20 55.99,20 59.17,23.17 59.17,33.97 K1.5
BMS_OUT2
  Route14 0.508: K2.5 56.63,12.38 60.44,8.56 U$2.3
CLK_ADC  (via drill 0.35)
  Route3 0.305: v41.22,26.62 41.22,27.15 40.12,28.25 29.35,28.25 v23.63,33.97
  Bottom 0.305: v41.22,26.62 39.01,26.62 R34.2 | U13.13 21.71,35.24 22.98,33.97 v23.63,33.97
DAC_OUT
  Bottom 0.203: IC2.4 18.23,20.34 18.53,20.63 20.44,20.63 21.07,20 21.07,19.36 | 21.07,19.36 21.07,16.18 22.98,14.28 22.98,10.47 24.88,8.56 JP8.1 | IC2.3 20.76,19.05 21.07,19.36
DIN_ADC
  Bottom 0.305: U13.11 22.34,37.78 24.88,35.24 24.88,23.17 26.15,21.9 29.32,21.9 31.23,23.8 R38.2
DOUT_ADC
  Bottom 0.305: R36.2 34.2,26.77 32.5,25.07 32.5,23.8 29.96,21.27 25.52,21.27 24.32,22.46 24.32,34.53 22.34,36.51 U13.12
GND  (via drill 0.3, 0.35, 0.5)
  Top 0.2: IC4.1 36.83,17.34 IC4.17 | IC4.7 37.83,18.34 IC4.17 | IC4.17 37.58,17.8 36.59,16.8
  Top 0.203: IC4.11 37.33,18.34 IC4.17
  Top 0.305: v42.02,10.47 41.39,11.11 R19.1
  Top 0.406: C19.2 40.12,42.86 v38.85,41.59
  other vias: 12.75,52.55 9.15,52.55 5.55,52.55 1.95,52.55 5.55,50.75 1.95,50.75 52.35,48.95 48.75,48.95 41.55,48.95 27.15,48.95 12.75,48.95 9.15,48.95 5.55,48.95 1.95,48.95 59.55,47.15 12.75,47.15 9.15,47.15 5.55,47.15 1.95,47.15 52.35,45.35 48.75,45.35 45.15,45.35 5.55,45.35 1.95,45.35 48.75,43.55 12.75,43.55 9.15,43.55 5.55,43.55 1.95,43.55 48.75,41.75 34.35,41.75 19.95,41.75 12.75,41.75 9.15,41.75 5.55,41.75 1.95,41.75 52.35,39.95 48.75,39.95 12.75,39.95 9.15,39.95 5.55,39.95 1.95,39.95 52.35,38.15 48.75,38.15 12.75,38.15 9.15,38.15 5.55,38.15 1.95,38.15 41.55,36.35 9.15,36.35 5.55,36.35 1.95,36.35 52.35,34.55 48.75,34.55 5.55,34.55 1.95,34.55 55.95,32.75 41.55,32.75 5.55,32.75 1.95,32.75 52.35,30.94 41.55,30.94 5.55,30.94 1.95,30.94 52.35,29.14 45.15,29.14 9.15,29.14 55.95,3.94 52.35,3.94 48.75,3.94 45.15,3.94 59.55,2.15 55.95,2.15 52.35,2.15 48.75,2.15 45.15,2.15 41.55,2.15 37.95,2.15 34.35,2.15 59.55,3.94 5.55,5.74 9.15,5.74 12.75,5.74 16.35,5.74 27.15,5.74 30.75,5.74 45.15,5.74 48.75,5.74 52.35,5.74 5.55,7.54 9.15,7.54 12.75,7.54 30.75,7.54 48.75,7.54 52.35,7.54 9.15,9.34 16.35,9.34 19.95,9.34 30.75,9.34 45.15,9.34 16.35,11.14 27.15,11.14 55.95,11.14 5.55,12.95 30.75,12.95 5.55,14.75 30.75,14.75 45.15,14.75 5.55,16.54 16.35,16.54 23.55,16.54 52.35,16.54 59.55,16.54 5.55,18.34 52.35,18.34 5.55,20.14 45.15,20.14 5.55,21.95 16.35,21.95 45.15,21.95 52.35,21.95 59.55,21.95 5.55,23.75 19.95,23.75 55.95,23.75 1.95,25.54 5.55,25.54 9.15,25.54 16.35,25.54 19.95,25.54 27.15,25.54 34.35,25.54 45.15,25.54 1.95,27.34 9.15,27.34 45.15,27.34 1.95,29.14 5.55,29.14 61.35,52.55 14.55,52.55 7.35,52.55 3.75,52.55 3.75,50.75 61.35,48.95 54.15,48.95 50.55,48.95 46.95,48.95 43.35,48.95 39.75,48.95 36.15,48.95 32.55,48.95 28.95,48.95 10.95,48.95 7.35,48.95 3.75,48.95 10.95,47.15 7.35,47.15 3.75,47.15 57.75,45.35 50.55,45.35 46.95,45.35 3.75,45.35 57.75,43.55 10.95,43.55 3.75,43.55 57.75,41.75 43.35,41.75 10.95,41.75 7.35,41.75 3.75,41.75 54.15,39.95 46.95,39.95 3.75,39.95 54.15,38.15 46.95,38.15 43.35,38.15 14.55,38.15 10.95,38.15 7.35,38.15 3.75,38.15 39.75,36.35 7.35,36.35 3.75,36.35 46.95,34.55 3.75,34.55 57.75,32.75 3.75,32.75 7.35,30.94 3.75,30.94 57.75,29.14 54.15,29.14 54.15,3.94 50.55,3.94 46.95,3.94 43.35,3.94 61.35,2.15 57.75,2.15 54.15,2.15 50.55,2.15 46.95,2.15 43.35,2.15 39.75,2.15 36.15,2.15 57.75,3.94 61.35,3.94 10.95,5.74 18.15,5.74 21.75,5.74 25.35,5.74 28.95,5.74 32.55,5.74 46.95,5.74 54.15,5.74 57.75,5.74 10.95,7.54 18.15,7.54 21.75,7.54 25.35,7.54 32.55,7.54 36.15,7.54 46.95,7.54 54.15,7.54 57.75,7.54 10.95,9.34 14.55,9.34 32.55,9.34 36.15,9.34 57.75,9.34 3.75,11.14 18.15,11.14 21.75,11.14 39.75,11.14 3.75,12.95 21.75,12.95 32.55,12.95 57.75,12.95 3.75,14.75 7.35,14.75 10.95,14.75 32.55,14.75 36.15,14.75 54.15,14.75 57.75,14.75 3.75,16.54 7.35,16.54 10.95,16.54 25.35,16.54 39.75,16.54 46.95,16.54 3.75,18.34 10.95,18.34 54.15,18.34 3.75,20.14 7.35,20.14 10.95,20.14 39.75,20.14 43.35,20.14 46.95,20.14 50.55,20.14 3.75,21.95 10.95,21.95 21.75,21.95 39.75,21.95 46.95,21.95 50.55,21.95 54.15,21.95 3.75,23.75 14.55,23.75 57.75,23.75 7.35,25.54 39.75,25.54 57.75,25.54 3.75,27.34 50.55,27.34 3.75,29.14
  pour Bottom: 0.75,52.38 0.75,2.85 2.66,0.94 62.35,0.94 64.25,2.85 64.25,53.65 62.98,54.92 3.29,54.92
  pour Top: 0.75,53.02 2.66,54.92 61.08,54.92 64.25,51.75 64.25,4.76 60.44,0.94 3.92,0.94 0.75,4.12
  pour Route3: 3.29,56.19 0.75,53.65 0.75,2.85 2.66,0.94 62.35,0.94 64.25,2.85 64.25,53.65 61.71,56.19
  pour Route14: 3.29,56.19 0.75,53.65 0.75,2.85 2.66,0.94 62.35,0.94 64.25,2.85 64.25,53.65 61.71,56.19
  pour Route15: 3.29,56.19 0.75,53.65 0.75,2.85 2.66,0.94 62.35,0.94 64.25,2.85 64.25,53.65 61.71,56.19
GPIO7  (via drill 0.35)
  Route14 0.254: J1.26 37.79,53.65 36.74,54.69 35.88,54.69 35.27,54.08 35.27,53.67 34.2,52.61 20.66,52.61 20.03,51.97 20.03,49.18 21.3,47.91 21.3,47.5 22.98,45.83 v22.98,21.27
  Bottom 0.254: IC2.5 22.98,20.04 v22.98,21.27
GPIO8  (via drill 0.35)
  Route14 0.254: J1.24 36.31,53.02 36.95,52.38 41.6,52.38 42.43,51.54 42.43,51.13 45.44,48.12 45.44,46.36 46.21,45.59 46.21,37.71 45.44,36.93 45.44,33.28 42.39,30.23 41.75,30.23 41.7,30.18 32.52,30.18 v29.32,26.98
  Bottom 0.254: R41.2 29.32,27.41 v29.32,26.98
  Bottom 0.305: R40.1 R41.2
GPIO9
  Bottom 0.254: J1.21 34.41,50.48 34.41,42.76 36.86,40.3 36.86,34.74 35.04,32.92 R37.2
  Bottom 0.305: R36.1 R37.2
GPIO10  (via drill 0.35)
  Route14 0.254: v24.88,18.09 24.25,18.09 23.61,18.72 23.61,20.63 28.69,25.71 29.32,25.71 v33.13,29.52
  Bottom 0.254: R39.2 26.79,35.03 26.79,46.03 27.42,46.67 31.23,46.67 31.87,47.3 31.87,50.48 J1.19 | IC2.7 24.57,18.4 v24.88,18.09 | R38.1 32.3,29.52 v33.13,29.52
  Bottom 0.305: R39.2 R38.1
GPIO11  (via drill 0.35)
  Route14 0.254: v24.88,20 33.77,28.88 41.34,28.88 v42.02,29.57
  Bottom 0.254: R35.2 37.58,33.12 37.58,49.84 J1.23 | IC2.6 23.94,19.05 v24.88,20 | R34.1 41.19,29.72 41.34,29.57 v42.02,29.57
  Bottom 0.305: R34.1 R35.2
GPIO17  (via drill 0.35)
  Route3 0.203: v44.56,33.33 44.56,35.71 44.94,36.09 44.94,42.48 v43.3,44.12
  Route14 0.203: J1.11 23.86,48.32 23.86,47.51 27.25,44.12 30.09,44.12 31.36,42.86 45.46,42.86 45.83,43.23 45.83,43.75 45.46,44.12 v43.3,44.12
  Bottom 0.305: v44.56,33.33 45.84,32.06 R24.1
GPIO22  (via drill 0.35)
  Route3 0.203: J1.15 23.86,48.82 23.86,36.25 29.32,30.79 38.16,30.79 42.66,26.28 42.66,17.93 44.41,16.18 v44.56,16.18
  Bottom 0.305: R26.1 46.9,15.55 46.27,16.18 v44.56,16.18
GPIO25  (via drill 0.35)
  Route3 0.203: v43.3,24.44 43.3,26.98 33.77,36.51 27.42,36.51 24.88,39.05 24.88,44.76 27.42,47.3 31.87,47.3 35.04,50.48 35.04,52.38 J1.22
  Bottom 0.305: v43.3,24.44 43.93,23.8 R30.1
GPIO27  (via drill 0.35)
  Route14 0.203: v45.2,43.49 31.23,43.49 J1.13
  Bottom 0.203: 46.9,43.06 R28.1
  Bottom 0.305: v45.2,43.49 46.47,42.22 R28.1
N$1
  Bottom 0.305: 10.91,24.44 R23.2
  Bottom 0.406: J6.4 8.37,19.36 8.37,22.33 R23.2
N$2
  Bottom 0.305: D2.A R25.1
N$3  (via drill 0.35)
  Route15 0.305: v20.44,15.55 19.8,14.91 19.8,11.74 U$4.2
  Bottom 0.305: IC3.4 20.14,15.25 v20.44,15.55
N$4  (via drill 0.35)
  Route3 0.305: v26.15,12.38 24.25,10.47 12.82,10.47 v12.18,11.11 | v11.55,13.01 11.55,9.83 12.82,8.56 18.53,8.56 19.8,7.29 U$4.1
  Bottom 0.305: IC3.7 25.84,12.68 v26.15,12.38 | v12.18,11.11 13.22,12.14 U14.3 11.95,12.61 v11.55,13.01
N$5  (via drill 0.35)
  Top 0.2: PWR_LED.A 60.44,54.54 60.06,54.92 59.17,54.92 v58.54,54.29
  Bottom 0.2: R1.1 62.46,54.17 62.35,54.29 v58.54,54.29
N$19
  Bottom 0.305: D1.A 55.48,33.85 | U8.3 54.32,32.7 D1.A | D1.A 55.36,33.97 | 55.36,33.97 55.36,35.24 54.73,35.87 54.73,37.78 55.62,38.67 D2.C | K1.2 52.19,36.51 54.73,33.97 55.36,33.97
N$20
  Bottom 0.305: U$3_SENSOR1.1 7.1,8.56 9.64,11.11 9.64,21.9 11.55,23.8 R33.2 13.25,25.3 C34.1 14.29,26.34 15.36,26.34 16.07,27.07 U13.1
N$22
  Top 0.508: U7.2 24.56,41.75 C17.1
  Top 0.813: U$1.2 9.64,44.76 10.33,45.45 14.46,45.45 14.7,45.21 14.7,44.85 CR1.1 16.02,44.85 16.02,45.21 16.25,45.45 20.86,45.45 C17.1
N$23
  Top 0.305: U7.5 29.43,36.71 R13.2
N$24  (via drill 0.35)
  Top 0.305: U7.4 25.68,40.15 v25.52,40.32
  Bottom 0.305: C18.1 25.52,41.16 v25.52,40.32
N$25
  Bottom 0.203: R14.1 34.41,37.14 35.04,37.78 C22.1
N$26  (via drill 0.35)
  Top 0.203: v31.95,38.96 32.67,39.68 C20.1
  Top 0.305: U7.7 33.09,40.15 C20.1
  Bottom 0.203: v31.95,38.96 30.13,37.14 R14.2
N$27
  Top 0.305: U7.1 26.15,43.19 26.15,44.97 C21.2
N$28  (via drill 0.5)
  Top 0.305: C21.1 31.87,44.33 31.87,42.22 31.4,41.75 U7.9
  Top 0.61: D9.2 18.53,33.17 v18.53,39.05 | v30.59,48.57 30.59,46.46 C21.1
  Top 0.813: C21.1 31.75,46.03 L1.1
  Bottom 0.61: v30.59,48.57 29.32,49.84 25.46,49.84 25.39,49.92 24.38,49.92 24.34,49.88 22.88,49.88 22.85,49.92 21.84,49.92 21.8,49.88 20.34,49.88 20.3,49.92 19.3,49.92 18.53,49.15 v18.53,39.05
N$29  (via drill 0.35)
  Top 0.305: v42.02,38.41 41.59,37.98 R15.2 | v29.89,43.43 30.59,42.73 U7.10
  Route3 0.305: v42.02,38.41 35.68,38.41 30.66,43.43 v29.89,43.43
N$30
  Top 0.305: R17.2 R16.1 33.71,36.99 33.71,37.42 32.85,38.28 31.03,38.28 30.63,38.68 30.63,39.31 U7.6
N$31
  Top 0.152: C28.1 35.64,15.55 36.66,15.55 37.33,16.22 IC4.2
N$32
  Top 0.254: C26.1 41.39,18.84 IC4.8 39.08,21.46 C25.1
N$33
  Top 0.254: C26.2 R18.2
N$34  (via drill 0.35)
  Top 0.2: v36.26,21.27 36.56,21.27 37.83,20 IC4.10
  Bottom 0.2: C27.1 35.04,17.88 35.04,20.63 35.68,21.27 v36.26,21.27
N$35
  Top 0.254: IC4.5 40.23,17.34 41.39,16.18 R19.2
N$36  (via drill 0.5)
  Top 0.305: IC4.13 34.52,18.84 34.02,18.34 | 34.02,18.34 32.5,16.82 31.87,16.82 29.98,18.7 L3.2 31.88,21.27 33.88,21.27 35.56,19.59 IC4.12 | IC4.14 34.02,18.34
  Top 0.508: L3.2 31.25,20.63 v32.5,20.63 | L3.2 31.25,18.09 v32.5,18.09 | L3.2 v32.5,19.36
  Bottom 0.508: v32.5,20.63 32.5,21.95 D10.2 34.16,21.02 | v32.5,19.36 34.16,21.02 | v32.5,18.09 34.16,19.75 34.16,21.02
N$37  (via drill 0.35)
  Top 0.305: R21.2 36.31,24.23 v36.31,25.07 36.31,22.18 38.29,20.21 38.29,19.63 IC4.9
  Bottom 0.305: R20.1 36.31,22.33 v36.31,25.07
N$38  (via drill 0.35)
  Top 0.305: R22.2 R15.1 40.55,33.97 v41.39,33.97 | v28.69,4.76 28.69,4.12 TP_STATUS.TP
  Route3 0.305: v28.69,4.76 38.85,4.76 48.16,14.07 48.16,30.7 45.53,33.33 44.85,32.65 44.28,32.65 42.96,33.97 v41.39,33.97
N$39
  Bottom 0.305: R24.2 50.97,32.06 U8.1
N$40
  Bottom 0.305: 59.02,18.5 D5.C 59.17,17.86 D3.A 55.99,14.91 | K2.2 47.11,17.45 54.09,17.45 55.99,15.55 55.99,14.91 | U9.3 54.73,13.64 55.99,14.91
N$41
  Bottom 0.305: D5.A R27.1
N$42
  Bottom 0.305: R26.2 50.8,12.69 U9.1
N$43
  Bottom 0.305: K3.2 53.33,46.79 | 53.33,46.79 55.04,45.08 | 55.04,45.08 55.99,44.12 D6.A | U10.3 55.04,43.65 55.04,45.08 | D7.C 55.37,48.83 53.33,46.79
N$44
  Bottom 0.305: R29.1 D7.A
N$45
  Bottom 0.305: R28.2 50.8,41.27 U10.1
N$46
  Bottom 0.305: D8.A 55.48,24.96 52.19,28.25 K4.2 | U11.3 54.32,23.8 D8.A | D8.A 57.49,26.98 57.9,26.98 59.17,28.25 D11.C
N$47
  Bottom 0.305: D11.A R31.1
N$48
  Bottom 0.305: R30.2 50.17,22.85 U11.1
N$49  (via drill 0.35)
  Route15 0.305: v16.62,12.38 16.62,13.64 19.21,16.23 20.72,16.23 21.4,15.55 v24.25,15.55
  Bottom 0.305: v16.62,12.38 15.9,11.65 U14.2 | IC3.5 24.54,15.25 v24.25,15.55
N$50  (via drill 0.35)
  Route14 0.305: v26.15,14.28 26,14.13 v16.14,14.13
  Bottom 0.305: IC3.6 25.84,13.33 26.15,13.64 v26.15,14.28 | U14.1 15,13.64 15.66,13.64 v16.14,14.13
N$51
  Bottom 0.254: JP8.2 29.32,13.64 28.69,14.28 28.69,20 28.05,20.63 27.42,20.63 26.79,20 R32.1
N$52  (via drill 0.35)
  Route14 0.254: v24.88,9.83 20.44,9.83 v17.89,12.38
  Bottom 0.203: v17.89,12.38 18.21,12.68 IC3.2
  Bottom 0.254: R32.2 27.42,15.34 27.42,12.38 v24.88,9.83
N$56
  Bottom 0.406: R23.1 C31.1 9.84,30.58 9,31.43 9,35.03 R42.2 15.15,32.7 U13.2
SCADA_OUT1
  Route14 0.508: K3.5 56.63,46.03 50.6,40 50.28,39.68 49.96,39.36 49.96,27.93 40.12,18.09 36.95,18.09 33.77,14.91 U$3.1
SCADA_OUT2
  Route14 0.508: U$3.3 48.38,11.11 48.38,22.54 54.09,28.25 K4.5
SHDN/!CS_ADC
  Bottom 0.305: U13.10 22.34,39.05 25.52,35.87 25.52,25.07 26.36,24.23 R40.2

## Text on the board
SilkscreenTop: + | - | Vin + | + | GND | - | GND | GND | +24V | V- | V+ | + | - | V+ | V- | V- | V+ | +5V | +24V | ST | COM | S1 | COM | S2 | B1 | COM | B2
SilkscreenBottom: - | + | RET EV / Current measuring device / Version : 1.0.3 / Date : January / Type : Prototype | - | + | - | - | + | + | - | +